# Altium PCB attack_board.PcbDoc
Units mil, origin at the board's own origin, x right, y up, seen from the top; angles counter-clockwise.
Board outline 1968.5 x 2165.35 mil, 2 copper layers (Top Layer, Bottom Layer); 54 components, 52 nets, 258 pads, 204 vias.
Unrouted connection lines stored in the file: 103.
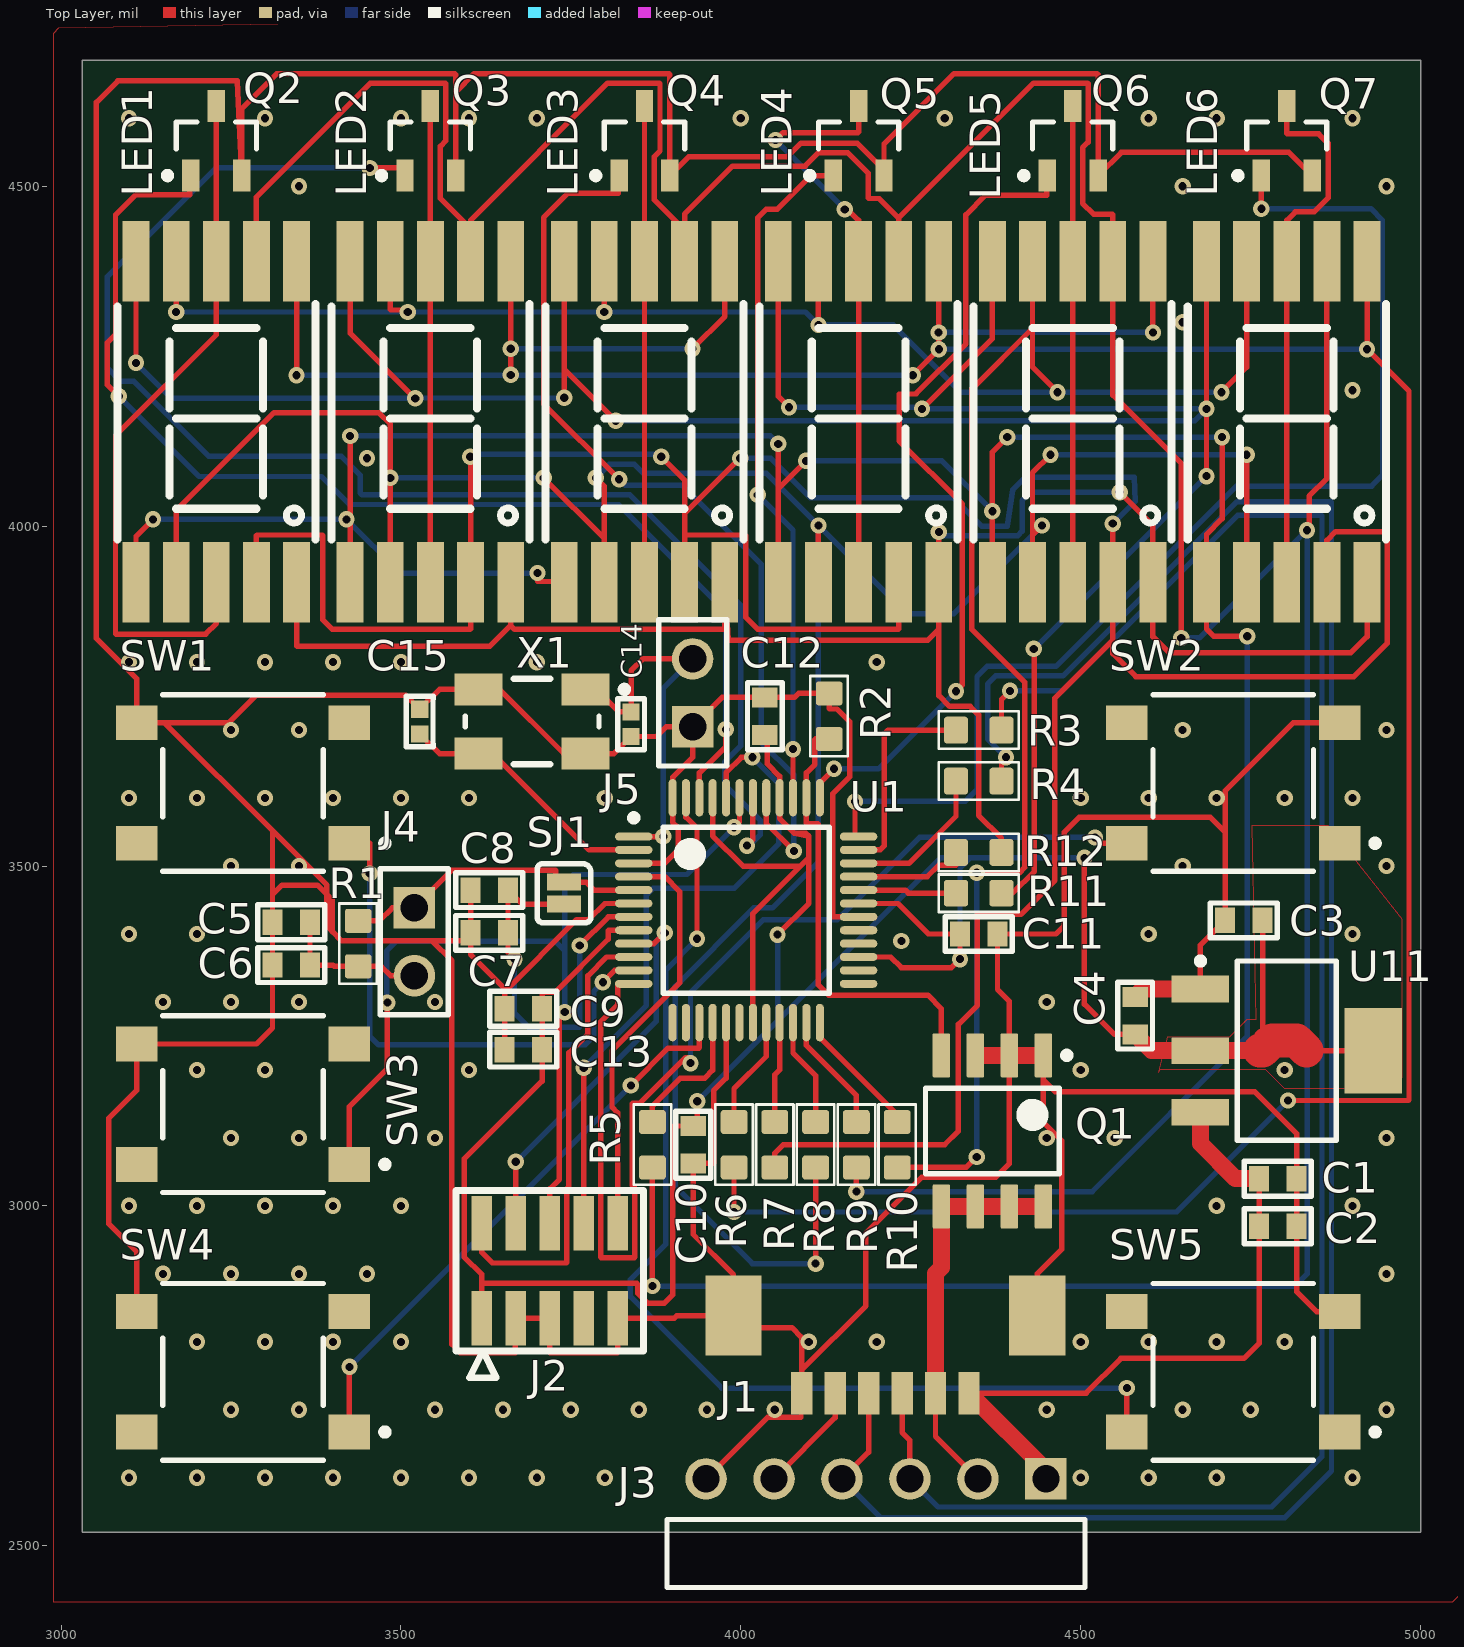
[diagram p0: Top Layer view]
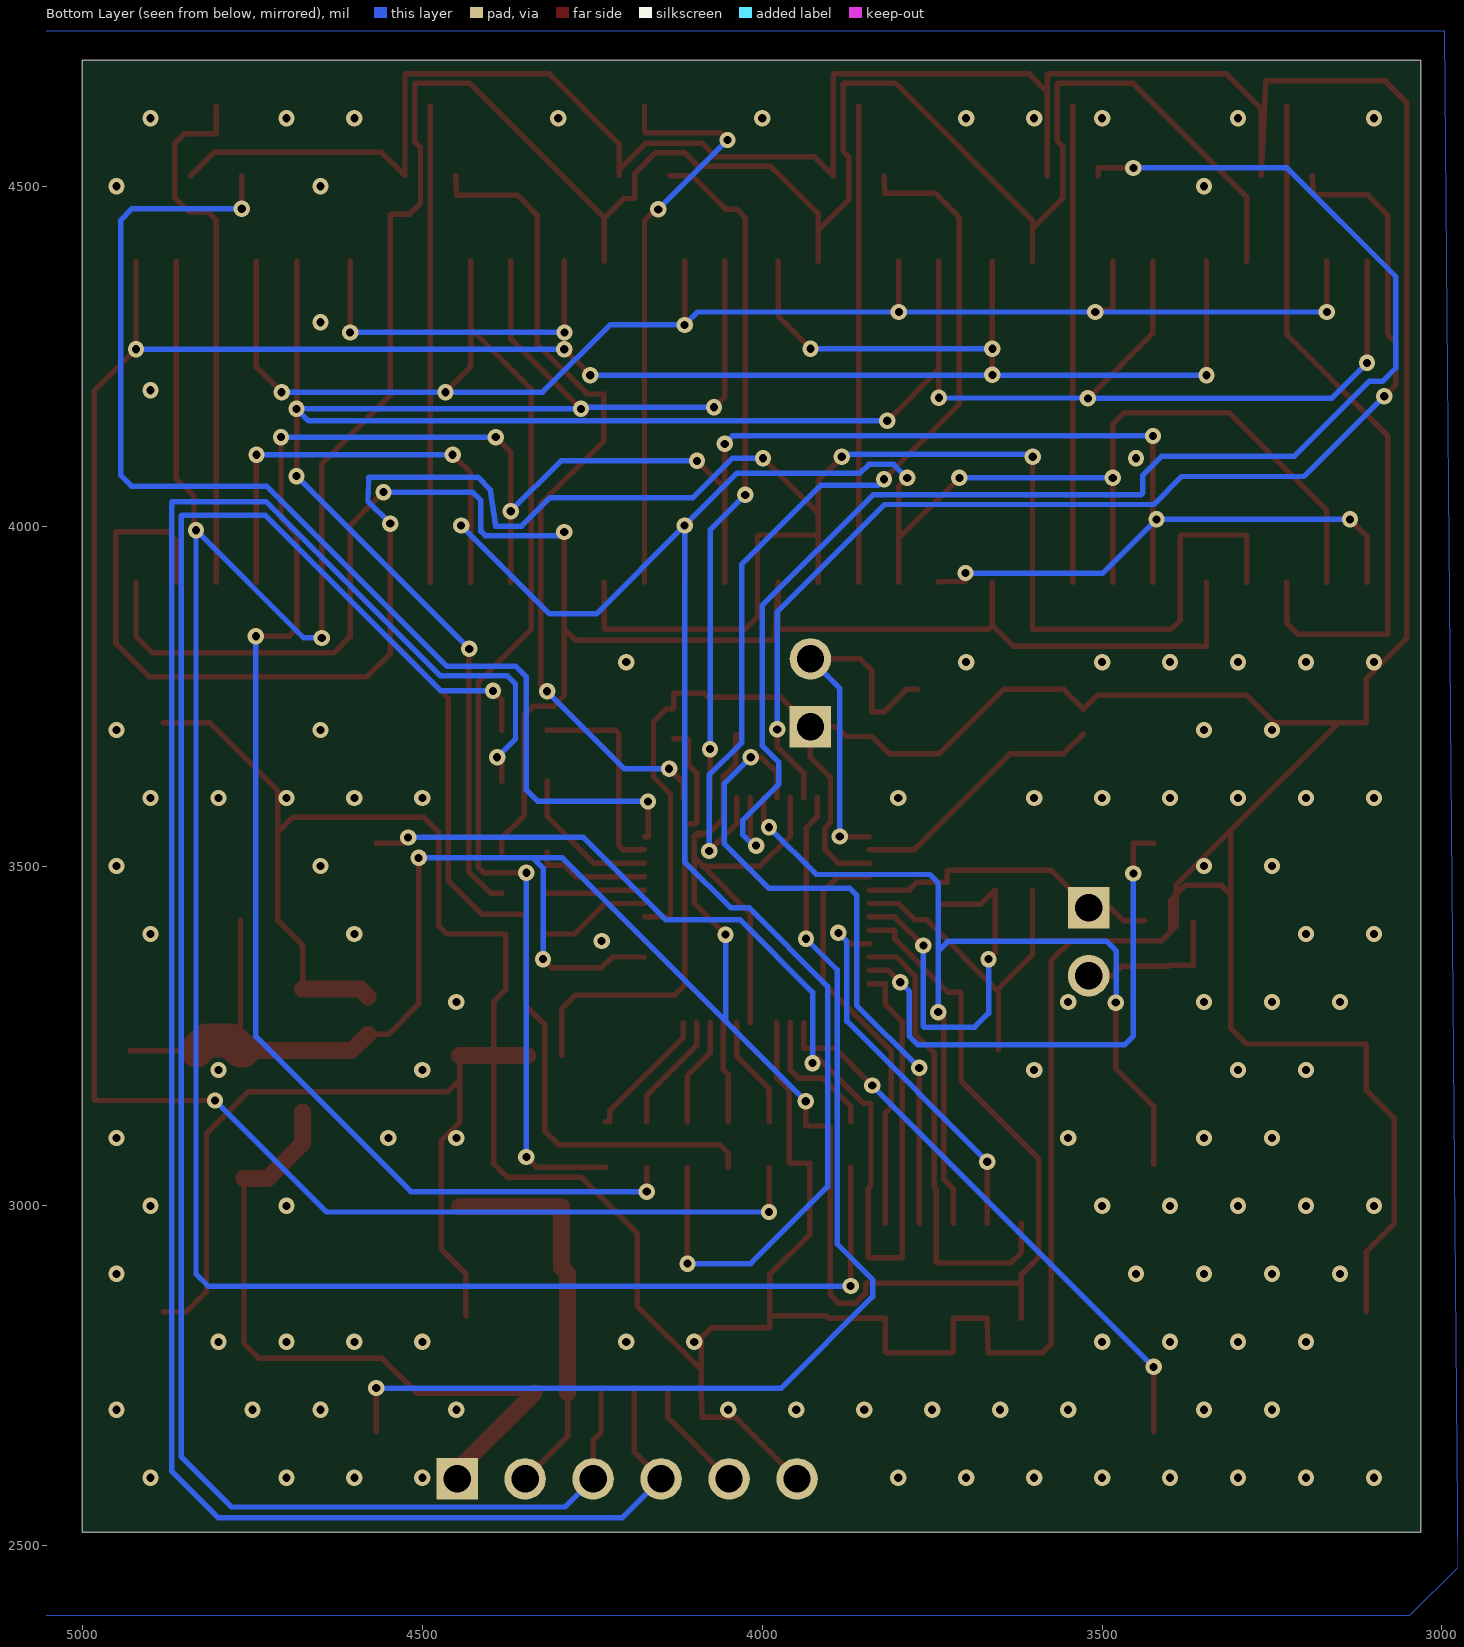
[diagram p1: Bottom Layer view, seen from below]
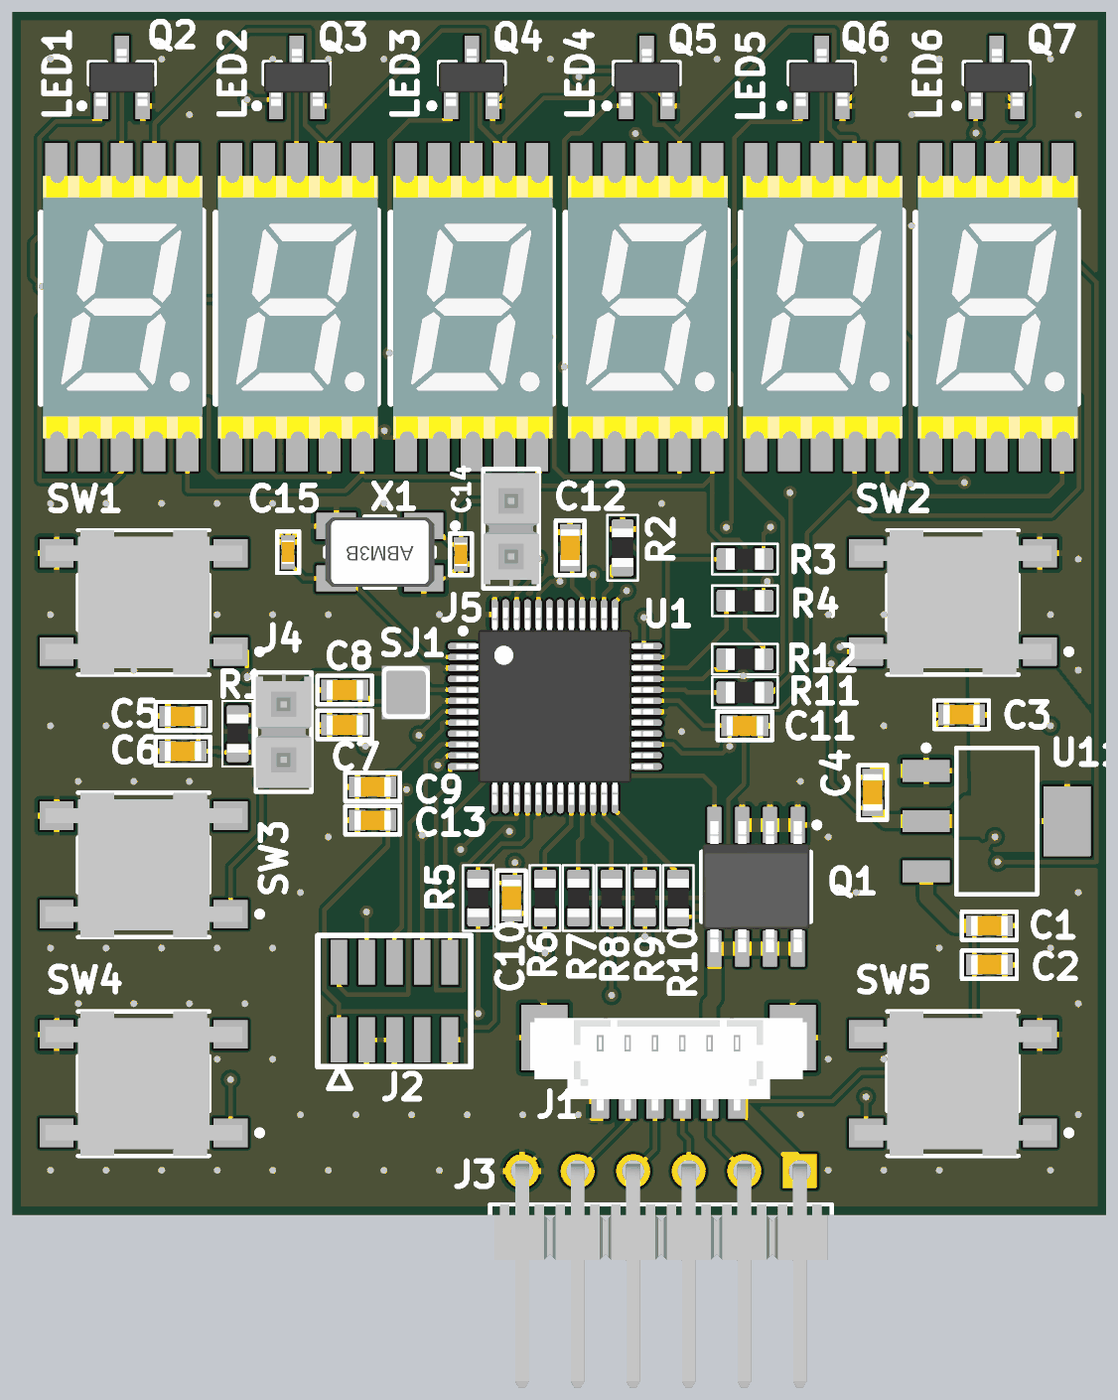
[diagram p2: 3D render of the assembled board from above, using the file's embedded part models]

## Layer stack, top to bottom
Top Solder: solder mask 0.4, Solder Resist, Dk 3.5
Top Layer: signal copper 1.4
Dielectric 1: dielectric 12.6, FR-4, Dk 4.8
Bottom Layer: signal copper 1.4
Bottom Solder: solder mask 0.4, Solder Resist, Dk 3.5

## Board outline
3031.5,2519.68 5000,2519.68 5000,4685.04 3031.5,4685.04

## Design rules (kind name [scope] priority, off if disabled: settings)
BoardOutlineClearance [All] p1: gap=15 ignorepadtopadclearanceinfootprint=FALSE except(0: Arc-SplitContinuation Track-SplitContinuation SMDPad-SplitContinuation THPad-SplitContinuation Via-SplitContinuation Fill-SplitContinuation Poly-SplitContinuation Region-SplitContinuation Text-SplitContinuation)
Clearance [All] p1: gap=6 ignorepadtopadclearanceinfootprint=FALSE except(0: Arc-Hole Track-Hole SMDPad-Hole THPad-Hole Via-Hole Fill-Hole Poly-Hole Region-Hole Text-Hole)
HoleSize [All] p1: absolutevalues=TRUE maxlimit=200 minlimit=1 maxpercent=80.000 minpercent=20.000
MinimumSolderMaskSliver [All] p1: minsoldermaskwidth=5
PlaneConnect PlaneConnect_viaDirect [IsVia] p1: planeconnectstyle=Direct reliefexpansion=20 reliefentries=4 reliefconductorwidth=10 reliefairgap=10
PlaneConnect [All] p2: planeconnectstyle=Relief reliefexpansion=20 reliefentries=4 reliefconductorwidth=10 reliefairgap=10
PolygonConnect PolygonConnect_viaDirect [All vs isVia] p1: connectstyle=Direct reliefconductorwidth=10 reliefentries=4 polygonreliefangle="90 Angle" airgapwidth=10
PolygonConnect [All] p2: connectstyle=Relief reliefconductorwidth=10 reliefentries=4 polygonreliefangle="90 Angle" airgapwidth=10
RoutingVias [All] p1: holewidth=12 width=24 viastyle="Through Hole" minholewidth=12 minwidth=24 maxholewidth=28 maxwidth=50
SilkToSilkClearance [All] p1: silktosilkclearance=5
SilkToSolderMaskClearance [IsPad] p1: minsilkscreentomaskgap=5 clearancetoexposedcopper=TRUE
SolderMaskExpansion [All] p1: expansion=4
Width [All] p1: maxlimit=100 minlimit=6 preferedwidth=8 minimp=50.000000 maximp=50.000000 favimp=50.000000
25 further rules are at their usual default settings.

## Components (designator, comment, footprint, x,y, rotation, side; value= is the part's Value field where it differs from the comment)
C1 "2u2" CAPC0603_M 4790,3040 r0 top
C2 "100n" CAPC0603_M 4790,2970 r180 top
C3 "2u2" CAPC0603_M 4740,3420 r180 top
C4 "100n" CAPC0603_M 4580,3280 r270 top
C5 "2u2" CAPC0603_M 3338.58,3417.32 r0 top
C6 "100n" CAPC0603_M 3338.58,3354.33 r0 top
C7 "2u2" CAPC0603_M 3629.92,3401.57 r180 top
C8 "100n" CAPC0603_M 3629.92,3464.57 r0 top
C9 "100n" CAPC0603_M 3680,3290 r0 top
C10 "100n" CAPC0603_M 3930,3090 r90 top
C11 "100n" CAPC0603_M 4350,3400 r180 top
C12 "100n" CAPC0603_M 4035.43,3720.47 r270 top
C13 "100n" CAPC0603_M 3680,3230 r0 top
C14 "18p" CAPC0402_M 3838.58,3708.66 r90 top
C15 "18p" CAPC0402_M 3527.56,3712.6 r270 top
J1 "6-PIN" 10114828-10106LF 4212.6,2755.91 r180 top
J2 "1296-T10" 1296-T10 3718.9,2904.53 r0 top
J3 "" SMTC-TSW-106-08-X-S-RA 4448.82,2598.43 r180 top
J4 "" SMTC-DW-02-16-X-S-200 3519.68,3438.58 r270 top
J5 "" SMTC-DW-02-16-X-S-200 3929.13,3704.72 r90 top
LED1 "7-Seg, SMD, CC" 7-SEG-SMD-10MM-10LEAD 3228.35,4153.54 r0 top
LED2 "7-Seg, SMD, CC" 7-SEG-SMD-10MM-10LEAD 3543.31,4153.54 r0 top
LED3 "7-Seg, SMD, CC" 7-SEG-SMD-10MM-10LEAD 3858.27,4153.54 r0 top
LED4 "7-Seg, SMD, CC" 7-SEG-SMD-10MM-10LEAD 4173.23,4153.54 r0 top
LED5 "7-Seg, SMD, CC" 7-SEG-SMD-10MM-10LEAD 4488.19,4153.54 r0 top
LED6 "7-Seg, SMD, CC" 7-SEG-SMD-10MM-10LEAD 4803.15,4153.54 r0 top
Q1 "IRF7807ZTRPBF" SOIC8_NARROW 4370.08,3110.24 r270 top
Q2 "IRLML2502" SOT95P245X110-3M 3228.35,4566.93 r90 top
Q3 "IRLML2502" SOT95P245X110-3M 3543.31,4566.93 r90 top
Q4 "IRLML2502" SOT95P245X110-3M 3858.27,4566.93 r90 top
Q5 "IRLML2502" SOT95P245X110-3M 4173.23,4566.93 r90 top
Q6 "IRLML2502" SOT95P245X110-3M 4488.19,4566.93 r90 top
Q7 "IRLML2502" SOT95P245X110-3M 4803.15,4566.93 r90 top
R1 "10R" RESC1608X55N 3437.01,3385.83 r90 top
R2 "100k" RESC1608X55N 4129.92,3720.47 r90 top
R3 "2k" RESC1608X55N 4350,3700 r0 top
R4 "2k" RESC1608X55N 4350,3625 r0 top
R5 "12R" RESC1608X55N 3870,3090 r90 top
R6 "12R" RESC1608X55N 3990,3090 r90 top
R7 "12R" RESC1608X55N 4050,3090 r90 top
R8 "12R" RESC1608X55N 4110,3090 r90 top
R9 "12R" RESC1608X55N 4170,3090 r90 top
R10 "12R" RESC1608X55N 4230,3090 r90 top
R11 "12R" RESC1608X55N 4350,3460 r180 top
R12 "12R" RESC1608X55N 4350,3520 r180 top
SJ1 "NC" SJ_2S_NC 3740,3460 r270 top
SW1 "B3S-1000" OMRON-B3S-1000-4_V 3267.72,3622.05 r180 top
SW2 "B3S-1000" OMRON-B3S-1000-4_V 4724.41,3622.05 r180 top
SW3 "B3S-1000" OMRON-B3S-1000-4_V 3267.72,3149.61 r180 top
SW4 "B3S-1000" OMRON-B3S-1000-4_V 3267.72,2755.91 r180 top
SW5 "B3S-1000" OMRON-B3S-1000-4_V 4724.41,2755.91 r180 top
U1 "ATSAM4LC2AA-AU" TSQFP50P900X900X120-48N 4007.87,3435.04 r0 top
U11 "REG1117-3.3" TI-DCY4_M 4803.15,3228.35 r0 top
X1 "ABM3B-12.000MHZ-B2-T" ABRA-ABM3B-4_V 3692.91,3712.6 r180 top

## Footprints (in the part's own frame and the unit in brackets; to place one, negate y for a bottom-side part, rotate by r counter-clockwise, add the part's x,y. Pads: shape width x height; smd on the part's side, far side on the other; paste and mask are expansions set on the pad)
7-SEG-SMD-10MM-10LEAD [mm]
  rect 1x3 smd: 1(-3,-6) 2(-1.5,-6) 3(0,-6) 4(1.5,-6) 5(3,-6) 6(3,6) 7(1.5,6) 8(0,6) 9(-1.5,6) 10(-3,6)
  silkscreen extent -3.7,-4.4 3.7,4.4, body extent -3.6,-6 3.7,6, height 3.8
1296-T10 [mm] "1.27mm x 10-pin"
  rect 0.76x2.05 smd: 1(-2.54,-1.775) 2(-2.54,1.775) 3(-1.27,-1.775) 4(-1.27,1.775) 5(0,-1.775) 6(0,1.775) 7(1.27,-1.775) 8(1.27,1.775) 9(2.54,-1.775) 10(2.54,1.775)
  silkscreen extent -3.5,-4 3.5,3
10114828-10106LF [mm] "1.25MM, 6POS"
  rect 0.8x1.6 smd: 1(-3.125,0.8) 2(-1.875,0.8) 3(-0.625,0.8) 4(0.625,0.8) 5(1.875,0.8) 6(3.125,0.8)
  rect 2.1x3 smd: S(-5.675,-2.1) S(5.675,-2.1)
  body extent -6.32,-3 6.32,1.23, height 4.65
ABRA-ABM3B-4_V [mm] "SMD, 4-Leads, Body 5x3.2mm"
  rect 1.8x1.2 smd: 1(-2,-1.2) 2(2,-1.2) 3(2,1.2) 4(-2,1.2)
  silkscreen extent -3.58,-1.6 2.5,1.6, body extent -2.5,-1.59 2.5,1.59, height 1.13
CAPC0402_M [mm] "Chip Capacitor, 2-Leads, Body 0402, IPC Medium Density"
  rect 0.64x0.64 smd: 1(-0.46,0) 2(0.46,0)
  silkscreen extent -0.95,-0.5 0.95,0.5, body extent -0.55,-0.3 0.55,0.3, height 0.6
CAPC0603_M [mm]
  rect 0.75x0.95 smd: 1(-0.7,0) 2(0.7,0)
  silkscreen extent -1.25,-0.65 1.25,0.65, body extent -0.85,-0.45 0.85,0.45, height 0.9
OMRON-B3S-1000-4_V [mm] "SMD, 4-Leads, Body 6.6x6mm"
  rect 1.55x1.3 smd: 1(-3.975,2.25) 2(3.975,2.25) 3(-3.975,-2.25) 4(3.975,-2.25)
  silkscreen extent -5.42,-3.3 3,3.3, body extent -4.5,-3.3 4.5,3.3, height 4.4
RESC1608X55N [mm] "Chip Resistor, Body 1.6x0.8mm, EIA 0603, IPC Medium Density"
  round 0.254 on Mech15: 0(0,0)
  rrect25% 0.9x1 smd: 1(-0.85,0) 2(0.85,0)
  Top Layer pour cut-out: -0.6,0.5 -0.4,0.7 0.4,0.7 0.6,0.5 0.6,-0.5 0.4,-0.7 -0.4,-0.7 -0.6,-0.5
  silkscreen extent -1.5,-0.7 1.5,0.7, body extent -0.87,-0.47 0.88,0.48, height 0.54
SJ_2S_NC [mil] "Solder Jumper, closed with solder paste"
  rect 25x50 smd: 1(-16.22,0) 2(16.22,0)
  silkscreen extent -43,-39 43,39
SMTC-DW-02-16-X-S-200 [mm] "Low Cost Board Spacer, 1x2 Pins, Vertical, 2.54mm Pitch, Male"
  rect 1.55x1.55 hole 1.02: 1(0,0)
  round 1.55 hole 1.02: 2(2.54,0)
  silkscreen extent -1.46,-1.27 4,1.27, body extent -1.4,-1.27 3.81,1.27, height 8.51
SMTC-TSW-106-08-X-S-RA [mm] ".025 SQ Post Terminal Strip Assembly, 1x6 Pins, Right Angle, 2.54mm Pitch, Male"
  rect 1.55x1.55 hole 1.02: 1(0,0)
  round 1.55 hole 1.02: 2(2.54,0) 3(5.08,0) 4(7.62,0) 5(10.16,0) 6(12.7,0)
  silkscreen extent -1.46,1.52 14.16,4.06, body extent -1.27,-0.32 13.97,9.9, height 3.05
SOIC8_NARROW [mm] "SOIC, 8-Leads, Body 5x4mm, Pitch 1.27mm, IPC Low Density"
  rrect15% 1.65x0.65 smd: 1(-2.825,1.905) 2(-2.825,0.635) 3(-2.825,-0.635) 4(-2.825,-1.905) 5(2.825,-1.905) 6(2.825,-0.635) 7(2.825,0.635) 8(2.825,1.905)
  silkscreen extent -2.95,-2.5 1.6,2.91, body extent -3,-2.45 3,2.45, height 1.63
SOT95P245X110-3M [mm] "SOT23, 3-Leads, Body 2.90x2.45mm, Pitch 0.95mm, IPC Low Density"
  rect 1.2x0.65 smd: 1(-1.3,0.95) 2(-1.3,-0.95) 3(1.3,0)
  silkscreen extent -1.42,-1.5 0.7,1.95, body extent -1.3,-1.5 1.3,1.5, height 1.1
TI-DCY4_M [mm] "SOT223, 4-Leads, Body 6.5x3.5mm, Pitch 2.3mm, IPC Low Density"
  rect 2.15x1 smd: 1(-3.225,2.3) 2(-3.225,0) 3(-3.225,-2.3)
  rect 2.15x3.2 smd: 4(3.225,0)
  silkscreen extent -3.35,-3.35 1.85,3.47, body extent -1.85,-3.35 1.85,3.35, height 1.8
TSQFP50P900X900X120-48N [mm] "TSQFP, 48-Leads, Body 7.00x7.00mm, Pitch 0.50mm, IPC Medium Density"
  oval 1.4x0.3 smd: 1(-4.2,2.75) 2(-4.2,2.25) 3(-4.2,1.75) 4(-4.2,1.25) 5(-4.2,0.75) 6(-4.2,0.25) 7(-4.2,-0.25) 8(-4.2,-0.75) 9(-4.2,-1.25) 10(-4.2,-1.75) 11(-4.2,-2.25) 12(-4.2,-2.75) 25(4.2,-2.75) 26(4.2,-2.25) 27(4.2,-1.75) 28(4.2,-1.25) 29(4.2,-0.75) 30(4.2,-0.25) 31(4.2,0.25) 32(4.2,0.75) 33(4.2,1.25) 34(4.2,1.75) 35(4.2,2.25) 36(4.2,2.75)
  oval 0.3x1.4 smd: 13(-2.75,-4.2) 14(-2.25,-4.2) 15(-1.75,-4.2) 16(-1.25,-4.2) 17(-0.75,-4.2) 18(-0.25,-4.2) 19(0.25,-4.2) 20(0.75,-4.2) 21(1.25,-4.2) 22(1.75,-4.2) 23(2.25,-4.2) 24(2.75,-4.2) 37(2.75,4.2) 38(2.25,4.2) 39(1.75,4.2) 40(1.25,4.2) 41(0.75,4.2) 42(0.25,4.2) 43(-0.25,4.2) 44(-0.75,4.2) 45(-1.25,4.2) 46(-1.75,4.2) 47(-2.25,4.2) 48(-2.75,4.2)
  silkscreen extent -4.32,-3.1 3.1,3.57, body extent -4.5,-4.5 4.5,4.5, height 1.2

## Part data
C1 C3 C5 C7: library part CCHIP-2u2-0603, "2u2, 0603", Case-EIA=0603, Case-Metric=1608, Component Type=Standard, Mounting Technology=SMT, Part Number=CCHIP-2u2-0603, Pin Count=2
C2 C4 C6 C8 C9 C10 C11 C12 C13: library part CCHIP-100n-0603, "100n, 0603", Case-EIA=0603, Case-Metric=1608, Component Type=Standard, Mounting Technology=SMT, Part Number=CCHIP-100n-0603, Pin Count=2
C14 C15: library part CCHIP-18p-0402, "18p, 0402", Case-EIA=0402, Component Type=Standard, Mounting Technology=SMT, Part Number=CCHIP-18p-0402, Pin Count=2
J1: library part 10114828-10106LF, "1.25MM, 6POS, VERT SMD", Manufacture 1=FCI, Supplier Part Number 1=609-4390-1-ND, Component Type=Standard, Manufacture Part Number 1=10114828-10106LF, Mounting Technology=SMT, Part Number=10114828-10106LF, Pin Count=8, Pitch=1.25mm, RoHS=Yes, Supplier 1=Digi-Key
J2: "Header, 10-pin, SMD, 0.05\"", Component Type=Standard, Mounting Technology=SMT, Part Number=1296-T10
J3: library part CMP-1024-00388-1, Manufacturer=Samtec, PartNumber=TSW-106-08-T-S-RA, Temperature Range="-55 to 105 degC", ComponentLink1Description="Manufacturer URL", ComponentLink1URL=http://www.samtec.com, ComponentLink2Description=Datasheet, ComponentLink2URL=http://www.samtec.com/documents/webfiles/pdf/TSW_TH.PDF, ComponentLink3Description="Package Specification", ComponentLink3URL=http://www.samtec.com/documents/webfiles/cpdf/TSW-XXX-XX-XXX-X-XX-XXX-MKT.pdf, DatasheetVersion=F-214, Mounting Technology=Through-hole, Orientation="Right Angle", PackageDescription=".025[0.64] SQ. Post Terminal Strip Assembly", PackageReference=TSW-106-08-X-S-RA, PackageVersion="DM, 8/1988", Pitch="2.54 mm", RoHS=True
J4 J5: library part CMP-1024-00001-1, Manufacturer=Samtec, PartNumber=DW-02-16-G-S-200, Temperature Range="-55 to 125 degC", ComponentLink1Description="Manufacturer URL", ComponentLink1URL=http://www.samtec.com, ComponentLink2Description=Datasheet, ComponentLink2URL=http://www.samtec.com/documents/webfiles/pdf/DW.PDF, ComponentLink3Description="Package Specification", ComponentLink3URL=http://www.samtec.com/documents/webfiles/cpdf/XW-XX-XX-XXX-X-XXXX-XXX-XX-XXX-MKT1.PDF, DatasheetVersion=F-214, Mounting Technology=Through-hole, Orientation=Vertical, PackageDescription="Low Cost Board Spacer", PackageReference=DW-02-16-X-S-200, PackageVersion="AX, 8/1984", Pitch="2.54 mm", RoHS=True
LED1 LED2 LED3 LED4 LED5 LED6: library part ACSC03, "7-Seg, CC"
Q1: "MOSFET, N-Channel, 8-SOIC, Logic Level", Manufacture 1="International Rectifier", Manufacturer 1="Alpha & Omega Semiconductor Inc", Manufacturer Part Number 1=AO4420, Package / Case=SOIC-8, Ratings="30V; 13.7A", ComponentLink1Description=http://www.aosmd.com/res/data_sheets/AO4420.pdf, ComponentLink1URL=http://www.aosmd.com/res/data_sheets/AO4420.pdf, Component Type=Standard, Manufacture Part Number 1=IRF7807ZTRPBF, Material=Silicon, Mounting Technology=SMT, Part Number=IRF7807ZTRPBF, Pin Count=8, SCDType=source, Supplier 1=Digi-Key
Q2 Q3 Q4 Q5 Q6 Q7: "MOSFET, N-Channel, SOT23, Logic Level", Manufacture 1="International Rectifier", Component Type=Standard, Manufacture Part Number 1=IRLML2502, Part Number=IRLML2502, Pin Count=3, Supplier 1=Digi-Key
R1: library part RCHIP-10R-0603, "10R res, 0603, 1%, 1/10W", Case-EIA=0603, Case-Metric=1608, Manufacture 1=Yageo, Manufacture Part Number 1=RC0603FR-0710RL, Rated Power=0.1W, Rated Voltage=75VDC, Supplier Part Number 1=311-10.0HRCT-ND, Temperature Range="-55C to 155C", Tolerance=1%, Component Type=Standard, Mounting Technology=SMT, Part Number=RCHIP-10R-0603, Pin Count=2, Supplier 1=Digi-Key
R2: library part RCHIP-100K-0603, "100k res, 0603, 1%, 1/10W", Case-EIA=0603, Case-Metric=1608, Manufacture 1=Yageo, Manufacture Part Number 1=RC0603FR-07100KL, Rated Power=0.1W, Rated Voltage=75VDC, Supplier Part Number 1=311-100KHRCT-ND, Temperature Range="-55C to 155C", Tolerance=1%, Component Type=Standard, Mounting Technology=SMT, Part Number=RCHIP-100K-0603, Pin Count=2, Supplier 1=Digi-Key
R3 R4: library part RCHIP-2K-0603, "2k res, 0603, 1%, 1/10W", Case-EIA=0603, Case-Metric=1608, Manufacture 1=Yageo, Manufacture Part Number 1=RC0603FR-072KL, Rated Power=0.1W, Rated Voltage=75VDC, Supplier Part Number 1=311-2.00KHRCT-ND, Temperature Range="-55C to 155C", Tolerance=1%, Component Type=Standard, Mounting Technology=SMT, Part Number=RCHIP-2K-0603, Pin Count=2, Supplier 1=Digi-Key
R5 R6 R7 R8 R9 R10 R11 R12: library part RCHIP-12R-0603, "12R res, 0603, 1%, 1/10W", Case-EIA=0603, Case-Metric=1608, Manufacture 1=Yageo, Manufacture Part Number 1=RC0603FR-0712RL, Rated Power=0.1W, Rated Voltage=75VDC, Supplier Part Number 1=311-12.0HRCT-ND, Temperature Range="-55C to 155C", Tolerance=1%, Component Type=Standard, Mounting Technology=SMT, Part Number=RCHIP-12R-0603, Pin Count=2, Supplier 1=Digi-Key
SJ1: library part SJ_2S, "Solder Jumper, NC", Component Type="Standard (No BOM)", Mounting Technology=COPPER, Part Number=SJ_2S, Pin Count=2
SW1 SW2 SW3 SW4 SW5: library part CMP-1677-00001-4, "Sealed Tactile Switch, SPST-NO, 3 to 24 V, -25 to 70 degC, 4-Pin SMD, RoHS, Bulk", Current Rating="50 mA", Manufacturer=Omron, Max Operating Temperature="70 degC", Min Operating Temperature="-25 degC", Package Quantity=1500, Voltage Rating="24 V", ComponentLink1Description="Manufacturer URL", ComponentLink1URL=http://www.omron.com/, ComponentLink2Description=Datasheet, ComponentLink2URL=http://www.omron.com/ecb/products/pdf/en-b3s.pdf, Contact Plating=Silver, DatasheetVersion=10/2014, Height="4.3 mm", Length="6.6 mm", Mount="Surface Mount", Mounting Technology="Surface Mount", PackageDescription="4-Pin Surface Mount Device, Body 6.6 x 6 mm", PackageReference=B3S-1000, Packaging=Bulk, REACH SVHC="No SVHC", RoHSCompliant=true
U1: "Atmel, SAM4L, 48-TQFP", Manufacture 1=Atmel, Supplier Part Number 1=ATSAM4LC2AA-AU-ND, Component Type=Standard, Manufacture Part Number 1=ATSAM4LC2AA-AU, Mounting Technology=SMT, Part Number=ATSAM4LC2AA-AU, Pin Count=48, Pitch=0.5mm, RoHS=Yes, Supplier 1=Digi-Key
U11: library part CMP-0395-00549-1, "Single Output LDO, 800 mA, Fixed 3.3 V Output, 3.8 to 15 V Input, with Internal Current Limiting, 4-pin SOT-223 (DCY), -40 to 125 degC, Green (RoHS & no Sb/Br)", Manufacturer="Texas Instruments", Rating=Catalog, Supplier Part Number 1=REG1117-3.3-ND, Code_JEDEC=TO-261, ComponentLink1Description="Manufacturer URL", ComponentLink1URL=http://www.ti.com/, ComponentLink2Description=Datasheet, ComponentLink2URL=http://www.ti.com/general/docs/lit/getliterature.tsp?genericPartNumber=REG1117-33&fileType=pdf, ComponentLink3Description="Package Specification", ComponentLink3URL=http://www.ti.com/litv/pdf/mpds094a, DatasheetVersion=SBVS001D, Eco-Plan="Green (RoHS & no Sb/Br)", Fixed Output Options(V)=5, Iout(Max)(A)=0.8, Iq(Typ)(mA)=4, Mounting Technology="Surface Mount", PackageDescription="4-Pin Plastic Small Outline, Body 3.5 x 6.5 mm, Pitch 2.3 mm", PackageReference=DCY4, PackageVersion=4202506/B, PartNumber=REG1117-3.3, SubFamily="Single Channel LDO", Supplier 1=Digi-Key, Vdo(Typ)(mV)=1100, Vin(Max)(V)=15, Vin(Min)(V)=3.8, Vout Adj(Max)(V)=3.3, Vout Adj(Min)(V)=3.3
X1: library part CMP-1688-00007-1, "Ceramic SMD Crystal, 12 MHz, +/- 20 ppm, 70 Ohm, -20 to 70 degC, 4-Pin SMD, RoHS, Tape and Reel", Case\Package=TO-263-4, Dropout Voltage="2 V", Max Input Voltage="25 V", Max Operating Temperature="125 degC", Max Ouput Current="1.5 A", Min Input Voltage="7 V", Min Operating Temperature="0 degC", Nominal Output Voltage="5 V", Package Quantity=500, ComponentLink1Description="Manufacturer URL", ComponentLink1URL=http://www.abracon.com/, ComponentLink2Description=Datasheet, ComponentLink2URL=http://www.abracon.com/Resonators/abm3b.pdf, DatasheetVersion=Aug-15, Mount="Surface Mount", Output Current="1.5 A", Outputs=1, Output Voltage="5 V", PackageDescription="4-Pin Surface Mount Device, Body 5 x 3.2 mm", PackageReference=ABM3B, Packaging="Tape and Reel", Pins=3, Radiation Hardening=No, REACH SVHC="No SVHC", RoHSCompliant=true, Weight="0.050897 oz"

## Via types
v1: diameter 24, hole 12, Top Layer to Bottom Layer, tented both sides, 204 vias

## Nets (pads, with @x,y where several pads share a name; then routed paths per layer and width w, separated by ;. In a path a pad name is that pad's centre, name@x,y a point inside that pad or via, vN(x,y) a via of type N, cw(c..) or ccw(c..) an arc to the next point about the centre after c; other vN are vias at no path point)
A: LED1.7 LED2.7 LED3.7 LED4.7 LED5.7 LED6.7 R5.1 | length 6037.4
  Top Layer w8: LED1.7 3287.4,4484 3455.13,4651.73 3565,4651.73 3566.1,4650.63 3566.1,4567 3557.91,4558.81 3557.91,4482 LED2.7@3602.36,4437.55 ; LED2.7 LED2.7@3602.36,4437.55 ; v1(3870,2882) R5.1 ; LED3.7 LED3.7@3917.32,4435.55 ; LED4.7 4232.28,4453.28 ; v1(4648,3835.5) 4648,4092 4547.24,4192.76 LED5.7 4547.24,4458 4546.24,4459 4518.79,4459 4502.79,4475 4502.79,4556.79 4511,4565 4511,4650.73 4510,4651.73 4430.73,4651.73 4232.28,4453.28 ; v1(4833,3994) 4836,3997 4836,4044 4862.2,4070.2 LED6.7 ; LED2.7@3602.36,4437.55 3602.36,4450 3804.09,4651.73 3880,4651.73 3881.06,4650.67 3881.06,4552 3872.87,4543.81 3872.87,4480 LED3.7@3917.32,4435.55 ; LED3.7@3917.32,4435.55 3917.32,4459 3988.03,4529.71 4094.74,4529.71 4114.4,4549.37 4157.25,4549.37 4187.5,4519.12 4187.5,4483 4188.5,4482 4203.57,4482 4232.28,4453.28
  Bottom Layer w8: v1(3870,2882) 4815,2882 4833,2900 v1(4833,3994) 4674.5,3835.5 v1(4648,3835.5)
B: LED1.6 LED2.6 LED3.6 LED4.6 LED5.6 LED6.6 R6.1 | length 5278.6
  Top Layer w8: v1(3346.46,4222) LED1.6 ; v1(3661.42,4222.5) v1(3661.42,4261) LED2.6 ; v1(3929,4261) 3976.38,4308.38 LED3.6 ; v1(3990,2991) R6.1 ; v1(4253,4222) v1(4291.34,4260.34) 4291.34,4285 v1@4291.34,4285.34 ; v1(4291,4285) v1@4291.34,4285.34 ; LED4.6 v1@4291.34,4285.34 ; v1(4606.3,4285) LED5.6 ; v1(4805,3155) 4982,3155 4983,3156 4983,4198.6 v1(4921.26,4260.34) LED6.6
  Bottom Layer w8: v1(3346.46,4222) v1@3661.92,4222 ; v1(3661.42,4222.5) v1@3661.92,4222 ; v1(3661.42,4261) v1(3929,4261) ; v1(3990,2991) 4641,2991 v1(4805,3155) ; v1(4253,4222) v1@3661.92,4222 ; v1(4291,4285) v1(4606.3,4285) ; v1(4291.34,4260.34) v1(4921.26,4260.34)
C: LED1.4 LED2.4 LED3.4 LED4.4 LED5.4 LED6.4 R7.1 | length 4742.5
  Top Layer w8: LED1.4 3287.4,3986 3288.4,3987 3384,3987 3385,3986 3385,3862 3399,3848 3601.36,3848 3602.36,3849 LED2.4 3602.36,4101.64 v1(3602,4102) ; v1(3883,4102) 3917.32,4067.68 3917.32,4018.32 ; LED3.4 3917.32,3986 ; v1(3999,4100) 3917.32,4018.32 ; R7.1 4050,3077.5 4062.5,3090 4300,3090 4320,3110 4320,3267 4348,3295 4348,3428 4349,3429 4412,3429 4462,3479 4462,3747 4547.24,3832.24 ; LED4.4 4232.28,3849 4231.28,3848 4025,3848 4007,3866 4007,3986 4006,3987 3918.32,3987 3917.32,3986 ; v1(4547.24,4003.74) LED5.4 4547.24,3832.24 ; LED6.4 4862.2,3979.2 4875,3992 4949.95,3992 4950.95,3991 4950.95,3827.45 4902.01,3778.51 4581.23,3778.51 4547.24,3812.5 4547.24,3832.24 ; 3917.32,3986 3917.32,4018.32
  Bottom Layer w8: v1(3602,4102) 3605.98,4105.98 3879.02,4105.98 v1(3883,4102) ; v1(3999,4100) 4044,4100 4102,4042 4312,4042 4354.08,3999.92 4392,3999.92 4400,4053.5 4418.5,4072 4579,4072 4580,4036.5 v1(4547.24,4003.74)
CROWBAR: Q1.4 R2.1 U1.38 | length 667.7
  Top Layer w8: R2.1 4110,3687.01 4109,3686.01 4109,3649.54 4096.46,3637 U1.38 4096.46,3563.74 4098,3562.2 4113,3562.2 4114,3561.2 4114,3325 4129,3310 4275,3310 4295.08,3289.92 Q1.4
D: LED1.2 LED2.2 LED3.2 LED4.2 LED5.2 LED6.2 R8.1 | length 4289.2
  Top Layer w8: LED1.2 3169.29,4023 3313.29,4167 3467.25,4167 3484.25,4150 v1(3484.25,4071) LED2.2 ; v1(3710,4071) 3799.21,3981.79 ; v1(3786.71,4071) 3799.21,4058.5 3799.21,3981.79 ; LED3.2 3799.21,3981.79 ; v1(4110,2915) R8.1 ; LED4.2 v1(4114.17,4001) ; LED5.2 4429.13,3987.13 ; v1(4443,4001) 4429.13,3987.13 ; v1(4455.5,4105) 4429.13,4078.63 4429.13,3987.13 ; LED6.2 v1(4744.09,4105)
  Bottom Layer w8: v1(3484.25,4071) v1(3710,4071) ; v1(3786.71,4071) 3806.71,4091 3843.23,4091 3856.73,4077.5 4037.67,4077.5 v1(4114.17,4001) ; v1(4110,2915) 4017,2915 3903.64,3028.36 3903.64,3323.02 4018.93,3438.31 4046.31,3438.31 4114.17,3506.17 v1(4114.17,4001) ; v1(4443,4001) 4313,3871 4244.17,3871 v1(4114.17,4001) ; v1(4455.5,4105) v1(4744.09,4105)
DP: LED1.5 LED2.5 LED3.5 LED4.5 LED5.5 LED6.5 R12.1 | length 2769.2
  Top Layer w8: LED1.5 3346.46,3824 3347.46,3823 3630.42,3823 3661.42,3854 ; LED2.5 3661.42,3854 ; v1(4291.34,3991.5) LED4.5 4291.34,3848.68 ; R12.1 4383.46,3541.04 4350,3574.5 4350,3722.5 4337.5,3735 4307,3735 4291.34,3750.66 4291.34,3848.68 ; v1(4557.3,4050) 4606.3,4001 LED5.5 4606.3,3837.5 4630.3,3813.5 4897.26,3813.5 4921.26,3837.5 LED6.5 ; 3661.42,3854 3661.42,3853.58 3667,3848 3975.38,3848 3976.38,3849 LED3.5 3981.54,3832.34 4275,3832.34 4291.34,3848.68
  Bottom Layer w8: v1(4291.34,3991.5) 4296.92,3985.92 4407.42,3985.92 4414,3992.5 4414,4037.5 4426.5,4050 v1(4557.3,4050)
E: LED1.1 LED2.1 LED3.1 LED4.1 LED5.1 LED6.1 R9.1 | length 4365.9
  Top Layer w8: LED1.1 3110.24,3985 v1(3135.24,4010) ; v1(3420,4010) v1@3425.2,4004.8 ; LED2.1 v1@3425.2,4004.8 ; v1(3425.2,4132.71) v1@3425.2,4004.8 ; v1(3701,3931) 3701,3919 3740.16,3918 LED3.1 ; LED4.1 4055.12,4055.12 ; v1(4055.12,4121) 4055.12,4055.12 ; v1(4096,4096) 4055.12,4055.12 ; v1(4170,3021) R9.1 ; LED5.1 v1(4370.08,4021.92) 4370.08,4109.08 v1(4392,4131) ; v1(4708,4131) 4708,4010.96 4685.04,3988 LED6.1 4685.04,3849 4696.04,3838 v1(4745,3838)
  Bottom Layer w8: v1(3135.24,4010) v1(3420,4010) 3499,3931 v1(3701,3931) ; v1(3425.2,4132.71) 4043.41,4132.71 v1(4055.12,4121) ; v1(4096,4096) 4296,4096 v1(4370.08,4021.92) ; v1(4170,3021) 4517,3021 4745,3249 v1(4745,3838) ; v1(4392,4131) v1(4708,4131)
F: LED1.9 LED2.9 LED3.9 LED4.9 LED5.9 LED6.9 R10.1 | length 3822.2
  Top Layer w8: v1(3169.29,4315) LED1.9 ; LED2.9 3484.25,4319 3485.25,4318 3507,4318 v1(3510,4315) ; v1(3799,4315) 3799.21,4315.21 LED3.9 ; v1(4114.17,4296) LED4.9 ; R10.1 4331.54,3056.54 v1(4347,3072) ; v1(4347,3490) 4409.63,3490 4417.96,3498.33 4417.96,3770.04 4340,3848 4340,4202 4429.13,4291.13 ; LED5.9 4429.13,4291.13 ; v1(4466,4197) 4429.13,4233.87 4429.13,4291.13 ; v1(4707.09,4197) 4744.09,4234 LED6.9
  Bottom Layer w8: v1(3169.29,4315) v1(3510,4315) v1(3799,4315) 4095.17,4315 v1(4114.17,4296) 4224,4296 4323,4197 v1(4466,4197) v1(4707.09,4197) ; v1(4347,3072) v1(4347,3490)
G: LED1.10 LED2.10 LED3.10 LED4.10 LED5.10 LED6.10 R11.1 | length 4388.4
  Top Layer w8: v1(3110.24,4240.26) LED1.10 ; LED2.10 3425.2,4283.8 v1(3521,4188) ; v1(3740.16,4188.98) 3740.16,4200.5 3740.16,4230.84 ; LED3.10 3740.16,4230.84 ; v1(3816,4155) 3740.16,4230.84 ; LED4.10 4055.12,4190.88 v1(4071,4175) ; v1@4264.08,4175 v1(4266.58,4172.5) 4370.08,4276 LED5.10 ; R11.1 4399.69,3460 4431.96,3492.27 4431.96,3818.54 v1(4431,3819.5) ; v1(4685.04,4073.54) v1(4685.04,4172.5) LED6.10
  Bottom Layer w8: v1(3110.24,4240.26) 3162.5,4188 v1(3521,4188) v1(3740.16,4188.98) ; v1(3816,4155) 4667.54,4155 v1(4685.04,4172.5) v1(4266.58,4172.5) ; v1(4071,4175) v1@4264.08,4175 ; v1(4431,3819.5) v1(4685.04,4073.54)
GND: C1.2 C2.1 C3.2 C4.1 C5.1 C6.1 C7.2 C8.1 C9.1 C10.1 C11.1 C12.1 C13.1 C14.1 C15.1 J1.6 J1.S J2.3 J2.5 J2.9 J3.6 J5.1 Q1.1 Q1.2 Q1.3 Q2.2 Q3.2 Q4.2 Q5.2 Q6.2 Q7.2 R2.2 SW1.4 SW2.3 SW3.4 SW4.4 SW5.3 U1.3 U1.6 U1.17 U1.30 U1.48 U11.1 X1.2 X1.4 | length 12857.2
  Top Layer w8: SW4.4 3111.22,2932.78 3070,2974 3070,3128.78 3111.22,3170 SW3.4 3287.5,3238.19 3311.02,3261.71 C6.1 C5.1 3311.02,3458.02 ; Q3.2 3580.71,4638.71 ; C8.1 3602.36,3433 C7.2 C7.2@3602.36,3390 ; C13.1 C9.1 3652.44,3315 ; U1.6 3799.84,3444.88 3775.97,3421.01 3758.45,3421.01 3652.44,3315 ; U1.3 3887.5,3503.94 3908,3524.44 3908,3555.61 3899.61,3564 U1.48 3899.61,3630.47 3929.13,3660 J5.1 ; J3.6 4039.39,2689 4088.57,2689 J1.6 4089.57,2758.57 ; U1.17 3978.35,3188 3960,3169.65 3960,3063.44 3959,3062.44 C10.1 3930,2958.17 3989.17,2899 J1.S@3989.17,2838.58 ; U1.30 4136,3425.2 4135,3426.2 4135,3606 4160,3631 4160,3712.5 4141.5,3731 4130.92,3731 4129.92,3732 R2.2 4084.9,3753.94 4079,3748.03 C12.1 3972.44,3748.03 J5.1 ; Q5.2 Q5.2@4210.63,4523.99 ; J1.S@4436.02,2838.58 4436.02,2900.02 4472,2936 4472,3096.08 4445.08,3123 4445.08,3185.42 ; Q1.1 4445.08,3185.42 ; U11.1 4676.18,3383.74 C3.2 4712.44,3550 ; Q7.2 4806.3,4550 4559.84,4550 Q6.2 4525.59,4664.14 4524,4665.73 4313.86,4665.73 4210.63,4562.5 Q5.2@4210.63,4523.99 ; SW5.3 4847,2844.49 4817.56,2873.93 C2.1 C1.2 4817.56,3106.44 4756,3168 4462.5,3168 4445.08,3185.42 ; SW2.3 4812.5,3710.63 4712.44,3610.57 4712.44,3550 ; 3152.37,3710.63 SW1.4 3111.22,3775.78 3052,3835 3052,4623.5 3083.5,4655 3259,4655 Q2.2 3265.75,4614 3317.48,4665.73 3579,4665.73 3580.71,4664.02 3580.71,4638.71 ; 3152.37,3710.63 3311.02,3551.98 ; 3152.37,3710.63 3246.63,3710.63 3287,3751 3507.27,3751 C15.1 3556.69,3759.84 X1.2 3645,3759.84 3739.49,3665.35 X1.4 3813.38,3665.35 C14.1 3876,3690.55 3890.17,3704.72 J5.1 ; 3311.02,3458.02 3325,3472 3377,3472 3391,3458 ; 3311.02,3458.02 3311.02,3551.98 ; 3311.02,3551.98 3391,3472 3391,3458 ; 3391,3458 3391,3411.5 3399,3403.5 ; 3391,3458 3399,3450 3399,3403.5 ; 3399,3403.5 3412.5,3390 3546,3390 ; 3546,3390 3575,3361 3575,2796.5 3587.5,2784 3667.9,2784 J2.3 J2.5 3718.9,2785 3719.9,2784 3817.9,2784 3818.9,2785 J2.9 3902,2834.65 3905.94,2838.58 J1.S@3989.17,2838.58 ; 3546,3390 C7.2@3602.36,3390 ; 3580.71,4638.71 3607.73,4665.73 3894,4665.73 3895.67,4664.06 Q4.2 3923.63,4543.71 4068.85,4543.71 4088.51,4563.37 4171.25,4563.37 Q5.2@4210.63,4523.99 ; C7.2@3602.36,3390 3602.36,3370.08 3652.44,3320 3652.44,3315 ; J1.S@3989.17,2838.58 3989.17,2821 4075,2821 4089.57,2806.43 4089.57,2758.57 ; 4089.57,2758.57 4184,2853 4184,2960 4266,3042 4375,3042 4395.08,3062.08 Q1.2 4395.08,3301 4377.56,3318.52 C11.1 4463.5,3400 4476,3412.5 4476,3550 4498,3572 4690.44,3572 4712.44,3550
  Top Layer w25: Q1.3 Q1.2 Q1.1 ; C4.1 4591.34,3318.9 U11.1
  other v1: 3100,2600 3200,2600 3300,2600 3400,2600 3500,2600 3600,2600 3700,2600 3800,2600 4500,2600 4600,2600 4700,2600 4900,2600 3250,2700 3350,2700 3550,2700 3650,2700 3750,2700 3850,2700 3950,2700 4050,2700 4450,2700 4650,2700 4750,2700 4950,2700 3200,2800 3300,2800 3400,2800 3500,2800 4100,2800 4200,2800 4500,2800 4600,2800 4700,2800 4800,2800 3150,2900 3250,2900 3350,2900 3450,2900 4950,2900 3100,3000 3200,3000 3300,3000 3400,3000 3500,3000 4700,3000 4900,3000 3250,3100 3350,3100 3550,3100 4450,3100 4550,3100 4950,3100 3200,3200 3300,3200 3600,3200 4500,3200 4800,3200 3150,3300 3250,3300 3350,3300 3550,3300 4450,3300 4236.22,3389.76 3100,3400 3200,3400 4600,3400 4900,3400 3250,3500 3350,3500 4650,3500 4950,3500 3100,3600 3200,3600 3300,3600 3400,3600 3500,3600 3600,3600 3800,3600 4500,3600 4600,3600 4700,3600 4800,3600 4900,3600 3250,3700 3350,3700 4650,3700 4950,3700 3100,3800 3200,3800 3300,3800 3400,3800 3500,3800 3700,3800 4200,3800 3450,4100 4900,4200 4650,4300 3350,4500 4650,4500 4950,4500 3100,4600 3300,4600 3500,4600 3600,4600 3700,4600 4000,4600 4300,4600 4600,4600 4700,4600 4900,4600
LED1: Q2.1 U1.46 | length 1743
  Top Layer w8: v1(3085,4191) 3068,4208 3068,4270 3080,4282 3080,4458 3109.5,4487.5 3189.44,4487.5 Q2.1 ; U1.46 3938.98,3637 3978,3676.02 v1(3978,3701.02)
  Bottom Layer w8: v1(3085,4191) 3203,4073 3382.86,4073 3424,4031.86 3820.14,4031.86 3978,3874 v1(3978,3701.02)
LED2: Q3.1 U1.42 | length 2211
  Top Layer w8: v1(3454,4527) 3505.91,4527 Q3.1 ; v1(4009,3530) 4017.72,3538.72 U1.42
  Bottom Layer w8: v1(3454,4527) 3228,4527 3068,4367 3068,4232.5 3087.5,4213 3107,4213 3217,4103 3412,4103 3440,4075 3440,4049 3443,4046 3837,4046 4000,3883 4000,3677 3976,3653 3976,3620 4028.78,3567.22 4028.78,3546.28 4012.5,3530 v1(4009,3530)
LED3: Q4.1 U1.41 | length 1379.4
  Top Layer w8: Q4.1 3819.87,4490 3746,4490 3710,4454 3710,4180 v1(3821,4069) ; U1.41 4037.4,3562.6 v1(4078,3522)
  Bottom Layer w8: v1(3821,4069) 3830,4060 3914,4060 4030,3944 4030,3682 4078,3634 v1(4078,3522)
LED4: Q5.1 U1.39 | length 1011.4
  Top Layer w8: v1(4025,4046) 4025,4453.86 4037.5,4466.36 4053.79,4466.36 4103.17,4515.75 Q5.1 ; U1.39 v1(4076.77,3672)
  Bottom Layer w8: v1(4025,4046) 4076.77,3994.23 v1(4076.77,3672)
LED5: Q6.1 U1.37 | length 1235.2
  Top Layer w8: U1.37 4116.14,3622.14 v1(4137,3643) ; v1(4316.5,3757) 4326,3766.5 4326,4032.5 4233,4125.5 4233,4194 4258,4195 4331,4268 4331,4458 4360,4487 4449.79,4487 Q6.1
  Bottom Layer w8: v1(4137,3643) 4202.5,3643 v1(4316.5,3757)
LED6: Q7.1 U1.36 | length 1738.1
  Top Layer w8: v1(4168,3595) 4168,3543.31 U1.36 ; v1(4765.75,4467) Q7.1
  Bottom Layer w8: v1(4168,3595) 4329.96,3595 4347.46,3612.5 4347.46,3778.6 4362.5,3793.64 4463.64,3793.64 4729,4059 4928,4059 4944,4075 4944,4450 4927,4467 v1(4765.75,4467)
LVCC: J1.2 J3.2 Q1.5 Q1.6 Q1.7 Q1.8 | length 580
  Top Layer w8: J1.2 4286.42,2660.83 J3.2
  Top Layer w25: J1.2 4286.42,2900.59 4295.08,2909.25 Q1.5 Q1.6 Q1.7 Q1.8
NetC5_2: C5.2 C6.2 J4.2 R1.1 | length 223.1
  Top Layer w8: C5.2 C6.2 3400,3354.33 3401.97,3352.36 R1.1 3471,3352.36 3484.78,3338.58 J4.2
NetC7_1: C7.1 C8.2 SJ1.2 U1.7 | length 597
  Top Layer w8: v1(3667,3363) 3657.48,3372.52 C7.1 C8.2 3678.26,3443.78 SJ1.2 ; v1(3763,3383) 3805.2,3425.2 U1.7
  Bottom Layer w8: v1(3667,3363) 3667,3283.5 3687.5,3263 3762,3263 3763,3264 v1(3763,3383)
NetJ1_3: J1.3 J3.3 R3.2 | length 2798.1
  Top Layer w8: J1.3 4237.2,2666.61 4248.82,2655 J3.3 ; R3.2 4383.46,3745.14 v1(4395.96,3757.64)
  Bottom Layer w8: J3.3 4290.24,2557 4781,2557 4855,2631 4855,4015 4854,4016 4731,4016 4472.64,3757.64 v1(4395.96,3757.64)
NetJ1_4: J1.4 J3.4 R4.2 | length 3113.9
  Top Layer w8: J3.4 4187.99,2637.6 J1.4 ; R4.2 4383.46,3653.46 v1(4390,3660)
  Bottom Layer w8: J3.4 4206.24,2541 4800,2541 4869,2610 4869,4035 4868,4036 4730,4036 4473.64,3779.64 4375,3779.64 4363,3767.64 4363,3687 v1(4390,3660)
NetJ1_5: J1.5 J3.5 | length 163.2
  Top Layer w8: J3.5 4138.78,2688.39 J1.5
NetJ4_1: J4.1 R1.2 SJ1.1 U1.5 | length 458.5
  Top Layer w8: R1.2 3468,3419.29 3487.29,3438.58 J4.1 3575.1,3494 3727,3494 3728,3493 3728,3476.22 SJ1.1 3772.35,3476.22 3784,3464.57 U1.5
NetLED1_3: LED1.3 LED1.8 Q2.3 | length 1053.4
  Top Layer w8: LED1.3 3228.35,3856.85 3212.5,3841 3081,3841 3080,3842 3080,4133.22 3228.35,4281.57 LED1.8 Q2.3
NetLED2_3: LED2.3 LED2.8 Q3.3 | length 700.8
  Top Layer w8: LED2.3 LED2.8 Q3.3
NetLED3_3: LED3.3 LED3.8 Q4.3 | length 700.8
  Top Layer w8: LED3.3 LED3.8 Q4.3
NetLED4_3: LED4.3 LED4.8 Q5.3 | length 869.1
  Top Layer w8: v1(4051,4568) 4062,4579 4172.23,4579 4173.23,4580 Q5.3 ; v1(4153,4466) 4157.23,4466 4173.23,4450 LED4.8 LED4.3
  Bottom Layer w8: v1(4051,4568) v1(4153,4466)
NetLED5_3: LED5.3 LED5.8 Q6.3 | length 700.8
  Top Layer w8: LED5.3 LED5.8 Q6.3
NetLED6_3: LED6.3 LED6.8 Q7.3 | length 794.4
  Top Layer w8: LED6.3 LED6.8 4803.15,4450 4815.65,4462.5 4843.5,4462.5 4864,4483 4864,4563 4850,4577 4804.15,4577 4803.15,4578 Q7.3
NetR5_2: R5.2 U1.16 | length 204
  Top Layer w8: R5.2 3870,3147 3911,3188 3947,3188 3958.66,3199.66 U1.16
NetR6_2: R6.2 U1.20 | length 165.9
  Top Layer w8: R6.2 3990,3172.6 4037.4,3220 U1.20
NetR7_2: R7.2 U1.21 | length 149.2
  Top Layer w8: R7.2 4050,3193 4057.09,3200.09 U1.21
NetR8_2: R8.2 U1.22 | length 160
  Top Layer w8: U1.22 4076.77,3225 4110,3191.77 R8.2
NetR9_2: R9.2 U1.23 | length 176.7
  Top Layer w8: U1.23 4096.46,3236.04 4170,3162.5 R9.2
NetR10_2: R10.2 U1.24 | length 196.8
  Top Layer w8: U1.24 4116.14,3248 4224.14,3140 4224.14,3123.46 R10.2
NetR11_2: R11.2 U1.32 | length 145.2
  Top Layer w8: U1.32 4242,3464.57 4246.57,3460 R11.2
NetR12_2: R12.2 U1.33 | length 169.2
  Top Layer w8: U1.33 4274.25,3484.25 4291,3501 4316.54,3501 R12.2
nRST: J2.10 U1.4 | length 609.3
  Top Layer w8: J2.10 3818.9,3137 3810.5,3145.4 3810.5,3228.6 3910,3328.1 3910,3462.5 3888.25,3484.25 U1.4
RX: R4.1 U1.34 | length 223.8
  Top Layer w8: U1.34 4247.26,3503.94 4316.54,3573.21 R4.1
SW1: SW1.1 U1.11 | length 791.2
  Top Layer w8: SW1.1 3454,3533.46 v1(3454,3489) ; v1(3797,3329) 3814.46,3346.46 U1.11
  Bottom Layer w8: v1(3454,3489) 3454,3250 3467,3237 3771,3237 3784,3250 3784,3316 v1(3797,3329)
SW2: SW2.2 U1.12 | length 1679.1
  Top Layer w8: U1.12 3819,3326.77 3819,3296 3793.86,3270.86 3793.86,2925 3794.86,2924 3843,2924 3844,2925 3844,3026 3840,3030 3840,3150 3841,3151 3851.75,3151 3918.75,3218 3925.5,3218 3926,3217.5 v1(3926,3210) ; v1(4521,3542) 4529.54,3533.46 SW2.2
  Bottom Layer w8: v1(3926,3210) 3926,3314 4033,3421 4142,3421 4263,3542 v1(4521,3542)
SW4: SW4.1 U1.15 | length 841.9
  Top Layer w8: SW4.1 v1(3424.21,2763.21) ; v1(3838.2,3177.2) 3893,3232 3937.98,3232 3938.98,3233 U1.15
  Bottom Layer w8: v1(3424.21,2763.21) v1(3838.2,3177.2)
SW5: SW5.2 U1.47 | length 1632
  Top Layer w8: U1.47 3919.29,3572 3935.5,3555.79 v1(3935.5,3393) ; SW5.2 v1(4567.91,2732)
  Bottom Layer w8: v1(3935.5,3393) 3889.64,3347.14 3889.64,2943.64 3837.5,2891.5 3837.5,2866.5 3972,2732 v1(4567.91,2732)
TCK: J2.4 U1.9 | length 570
  Top Layer w8: J2.4 v1(3668.9,3064.9) ; U1.9 3872.19,3385.83 v1(3888,3401.64)
  Bottom Layer w8: v1(3668.9,3064.9) 3875.64,3271.64 3875.64,3389.28 v1(3888,3401.64)
TDI: J2.8 U1.44 | length 975.4
  Top Layer w8: J2.8 v1(3768.9,3203) ; U1.44 3978.35,3637.5 4000.79,3659.94 v1(4016.94,3659.94)
  Bottom Layer w8: v1(3768.9,3203) 3861,3295.1 3861,3457 3871.44,3467.44 3990.61,3467.44 4056,3532.83 4056,3620.88 v1(4016.94,3659.94)
TDO: J2.6 SW3.1 U1.43 | length 1450.5
  Top Layer w8: SW3.1 3424.21,3146.21 3480,3202 v1(3480,3299) ; J2.6 3718.9,3024.9 3732.9,3038.9 3732.9,3276.9 v1(3741,3285) ; v1(3990,3557) 3998.03,3565.03 U1.43
  Bottom Layer w8: v1(3480,3299) 3479,3300 3479,3375 3493,3389 3727,3389 3741,3375 ; v1(3741,3285) 3741,3375 ; v1(3990,3557) 3920.5,3487.5 3753.5,3487.5 3741,3475 3741,3375
TMS: J2.2 U1.10 | length 688.1
  Top Layer w8: J2.2 3618.9,2931.6 3634.5,2916 3742.94,2916 3743.94,2917 3743.94,3025 3746.9,3027.96 3746.9,3225 3775,3253.1 3775,3338.5 3802.64,3366.14 U1.10
TX: R3.1 U1.35 | length 312.9
  Top Layer w8: U1.35 4205,3523.62 4210.79,3529.41 4210.79,3694.29 4216.5,3700 R3.1
VBAT: C1.1 C2.2 J1.1 J3.1 U11.3 | length 1060.1
  Top Layer w8: J1.1 4507.87,2724.41 4559.06,2775.59 4740.16,2775.59 4762.44,2797.87 4762.44,3004 ; C2.2 4762.44,3004 ; C1.1 4762.44,3004
  Top Layer w25: J1.1 4448.82,2611.22 J3.1 ; U11.3 4676.18,3091.53 4727.72,3040 C1.1
VCC: C3.1 C4.2 C9.2 C10.2 C11.2 C12.2 C13.2 J2.1 U1.8 U1.19 U1.27 U1.31 U1.40 U1.45 U11.2 U11.4 | length 4509.1
  Top Layer w8: J2.1 3618.9,2885 ; U1.8 3806,3405.51 3804.96,3404.47 3804.96,3392.54 3726.42,3314 3708.56,3314 3707.56,3313 C9.2 C13.2 3707.56,3183.62 3593,3069.06 3593,2925 3618.9,2899.1 3618.9,2885 ; v1(3936,3154) 3936,3117.56 C10.2 3901,3117.56 3900,3116.56 3900,2869.5 3887.5,2857 3862.5,2857 3848,2871.5 3848,2885 3847,2886 3619.9,2886 3618.9,2885 ; U1.45 3958.66,3544.34 4003.3,3499.7 4087.5,3499.7 ; U1.19 4017.72,3429.91 4087.5,3499.7 ; C12.2 4039,3692.91 4039,3650.09 4057.09,3632 U1.40 4057.09,3569.89 4078.78,3548.2 ; v1(4054,3399) 4100,3445 4100,3512.2 ; U1.27 4220.47,3366.14 4236.22,3350.39 4309.84,3350.39 v1(4322.44,3363) C11.2 4275.88,3400 4231,3444.88 U1.31 ; v1(4505.5,3512) 4505.5,3296.94 4550,3252.44 C4.2 ; C3.1 4767.56,3248.29 4777.52,3238.33 4787.5,3228.35 4832.47,3228.35 U11.4 ; 4078.78,3548.2 4095.8,3548.2 4100,3544 ; 4078.78,3548.2 4100,3544 ; 4087.5,3499.7 4100,3512.2 ; 4100,3512.2 4100,3544
  Top Layer w25: C4.2 4604.1,3228.35 U11.2 4763.78,3228.35 4767.56,3232.13 4767.56,3248.29
  Top Layer w50: 4763.78,3228.35 4767.53,3228.35 4782.19,3243 4817.81,3243 4832.47,3228.35
  Bottom Layer w8: v1(3936,3154) 4054,3272 ; v1(4054,3399) 4054,3272 ; v1(4322.44,3363) 4322.44,3496.94 4337.5,3512 ; v1(4505.5,3512) 4337.5,3512 ; 4054,3272 4294,3512 4337.5,3512
XIN0: C14.2 J5.2 U1.1 X1.1 | length 561.8
  Top Layer w8: X1.1 3788,3759.84 3821.07,3726.77 C14.2 3838.58,3787.5 3855.81,3804.72 J5.2 ; U1.1 v1(3886,3543.31)
  Bottom Layer w8: v1(3886,3543.31) 3886,3761.59 J5.2
XOUT0: C15.2 U1.2 X1.3 | length 385.7
  Top Layer w8: C15.2 3556.69,3665.35 X1.3 3635,3665.35 3776.73,3523.62 U1.2
pads on no net: J2.7 R1.0 R2.0 R3.0 R4.0 R5.0 R6.0 R7.0 R8.0 R9.0 R10.0 R11.0 R12.0 SW1.2 SW1.3 SW2.1 SW2.4 SW3.2 SW3.3 SW4.2 SW4.3 SW5.1 SW5.4 U1.13 U1.14 U1.18 U1.25 U1.26 U1.28 U1.29

## Polygon pours and split planes (outlines as drawn)
GND on Bottom Layer "BOTGND" (solid, shelved, pour order 4): 2996.06,4728.35 5094.49,4728.35 5082.68,4716.54 5082.68,2397.64 3047.24,2397.64 2976.38,2468.5
VCC on Top Layer "VCCTHERM" (solid, shelved, pour order 0): 4614.17,3196.85 4618.11,3200.79 4771.65,3200.79 4799.21,3173.23 4956.69,3173.23 4972.8,3189.34 4972.8,3421.86 4864.48,3559.06 4751.97,3559.06 4757.36,3273.7 4744.17,3273.7 4718.5,3248.03 4627.36,3248.03
GND on Top Layer "TOPGND" (solid, remove dead copper, shelved, pour order 2): 2996.06,4732.28 2988.19,4724.41 2988.19,2417.32 5047.24,2417.32 5094.49,2464.57 5094.49,4771.65

## Silkscreen, mask and mechanical layers (free items; w line width, h text height)
Mechanical 1:
  the board outline again, w11.81